# Altium PCB AT short bus ( 7 x 4.2 inches).PCBDOC
Units mil, origin at the board's own origin, x right, y up, seen from the top; angles counter-clockwise.
Board outline 7000 x 4200 mil, 10 copper layers (TopLayer, MidLayer1, MidLayer2, MidLayer3, MidLayer4, MidLayer5, MidLayer6, MidLayer7, MidLayer8, BottomLayer); 1 components, 0 nets, 103 pads, 0 vias.
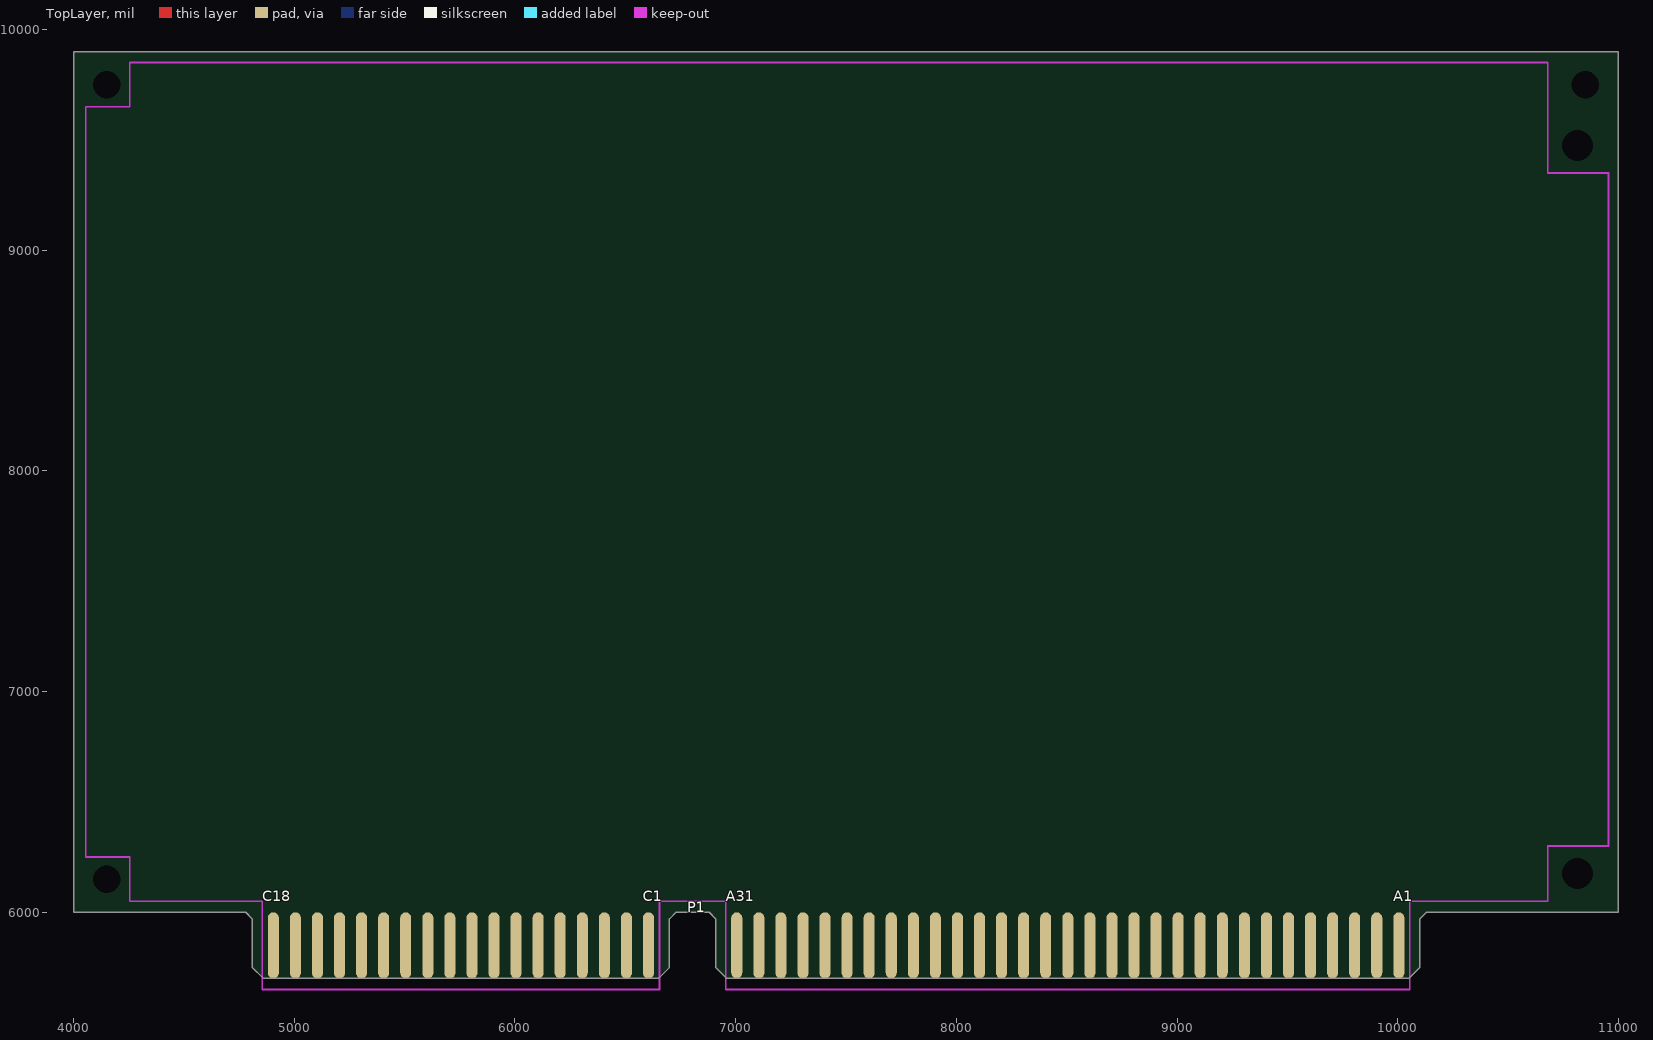
[diagram p0: TopLayer view]
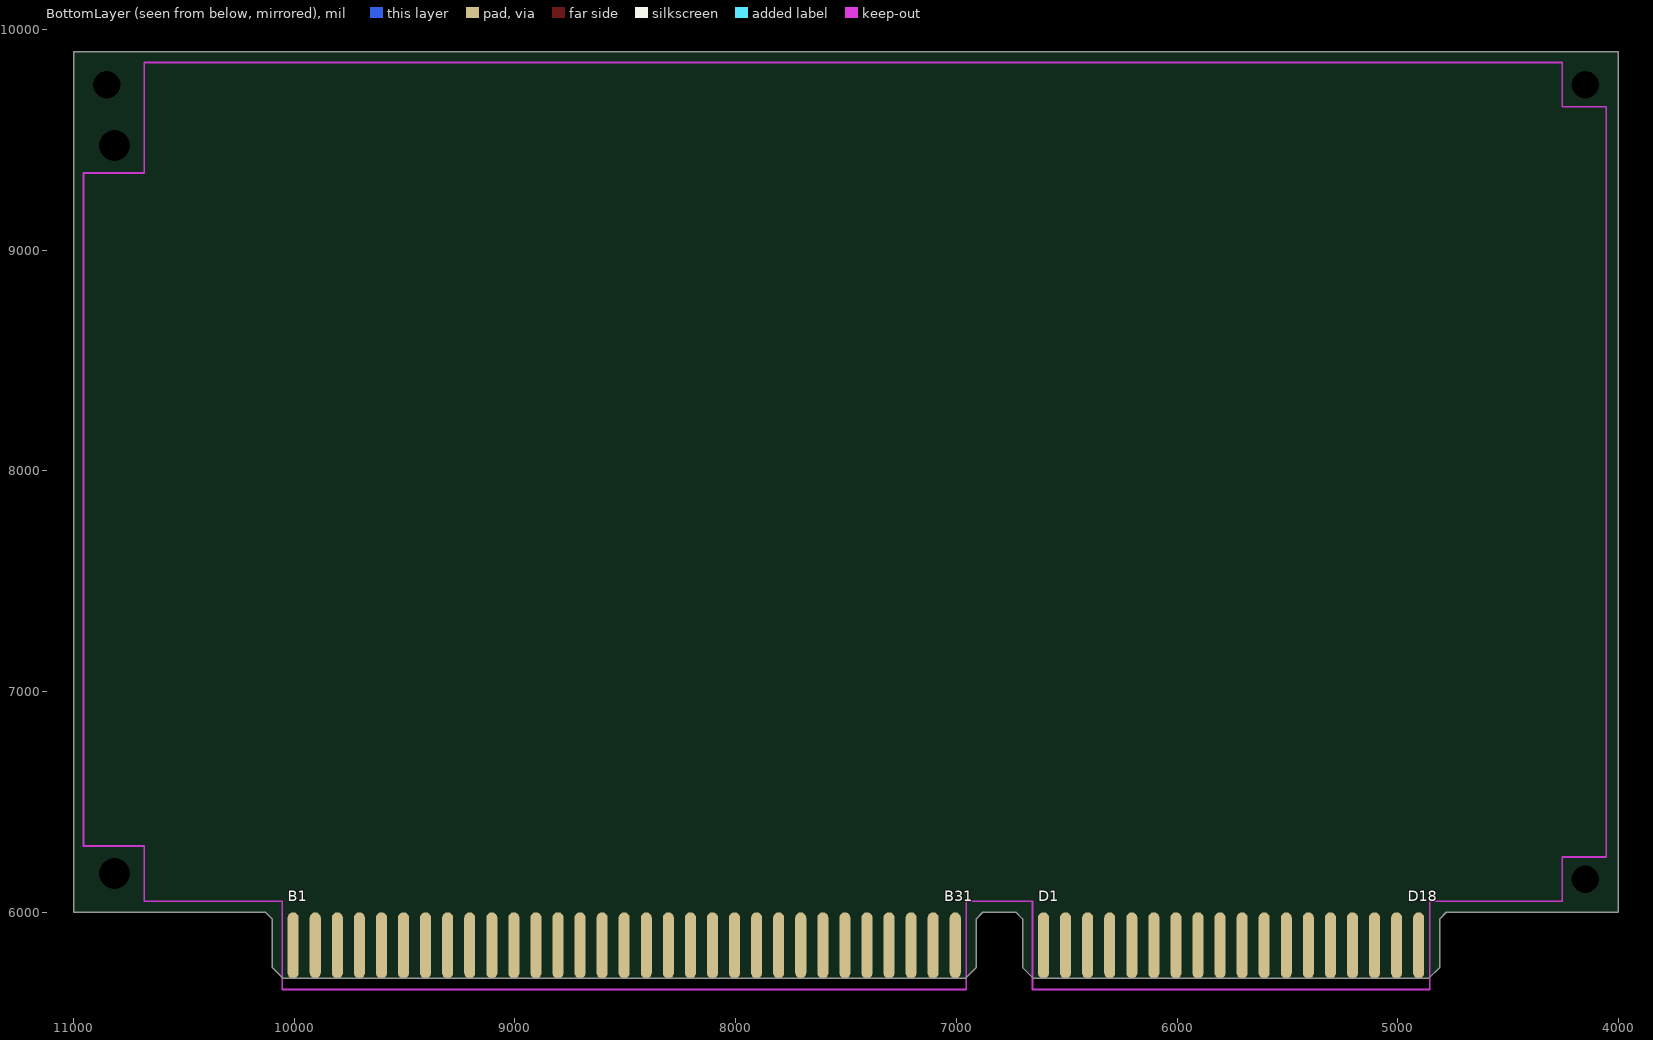
[diagram p1: BottomLayer view, seen from below]
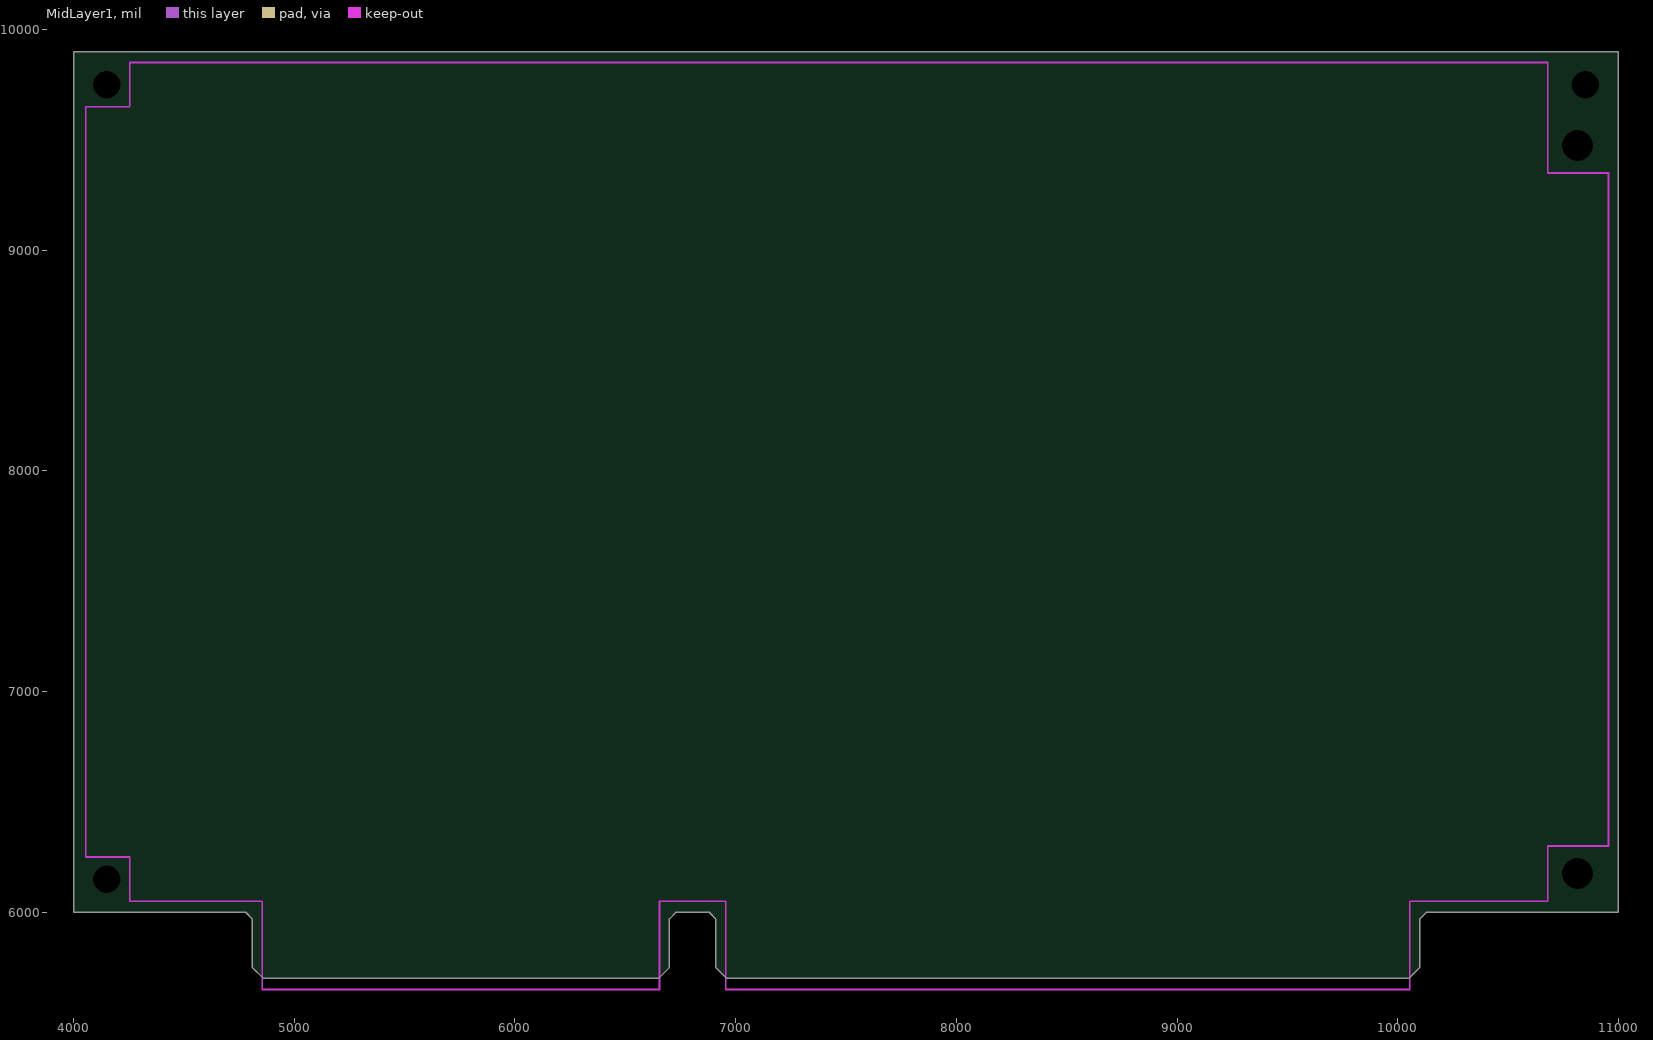
[diagram p2: MidLayer1]
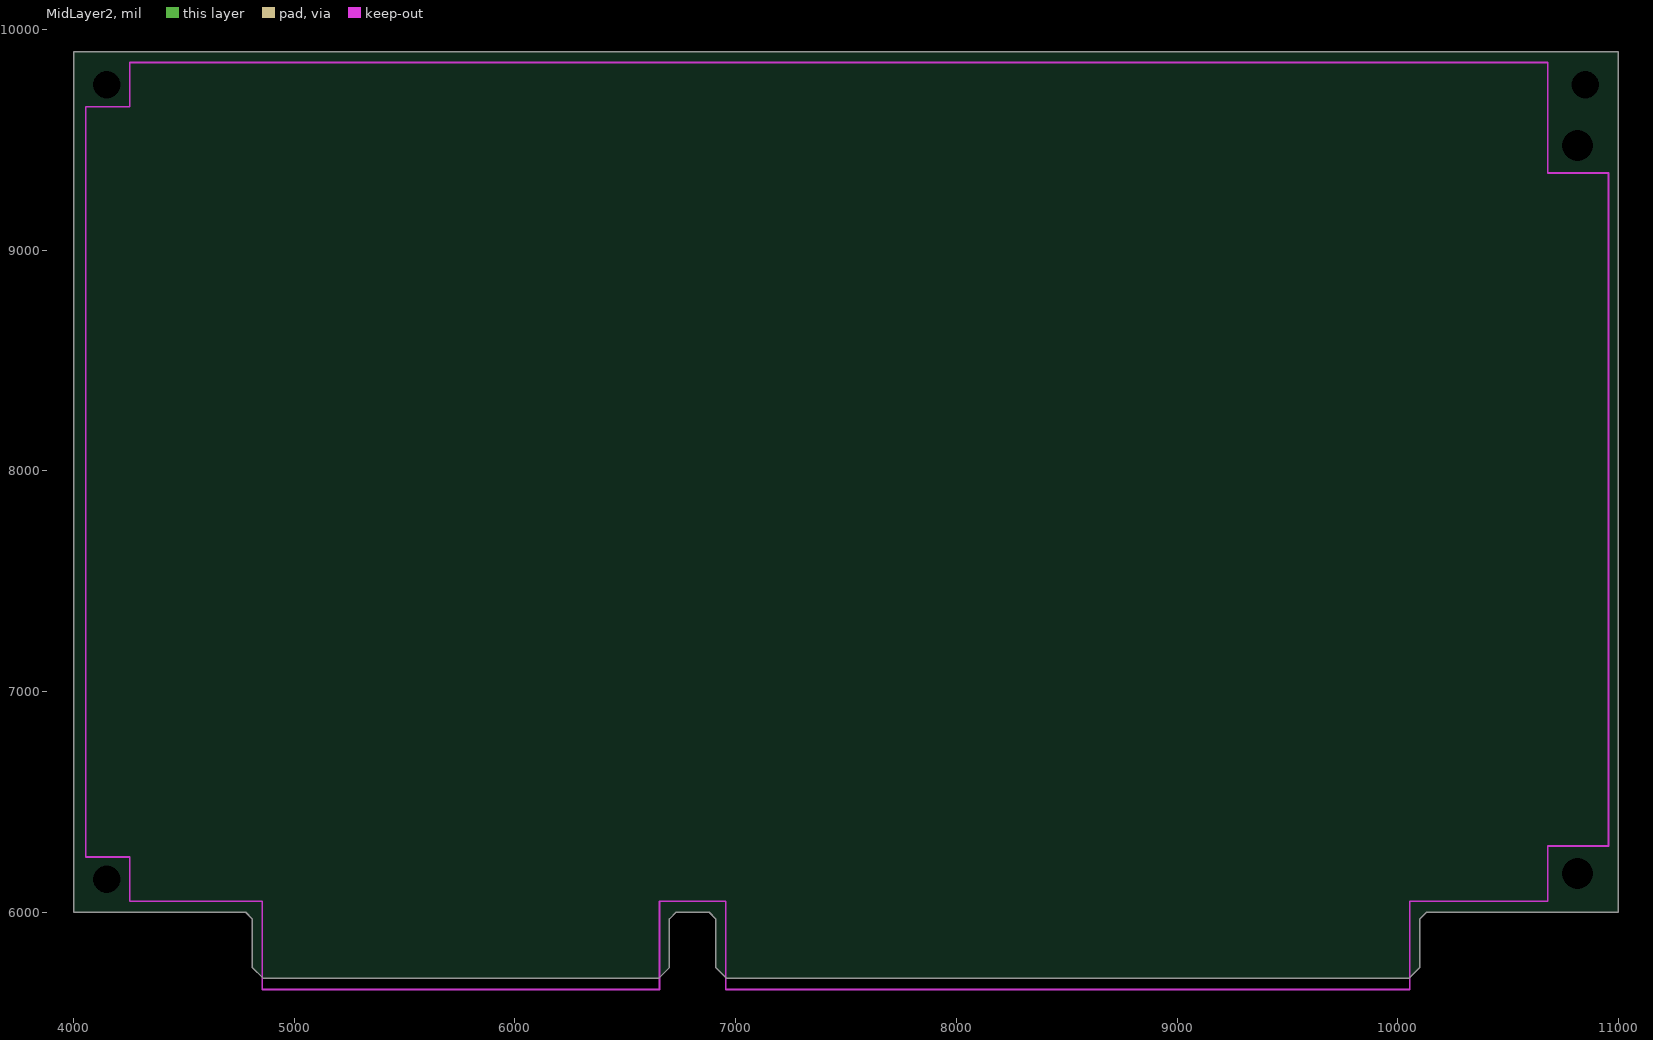
[diagram p3: MidLayer2]
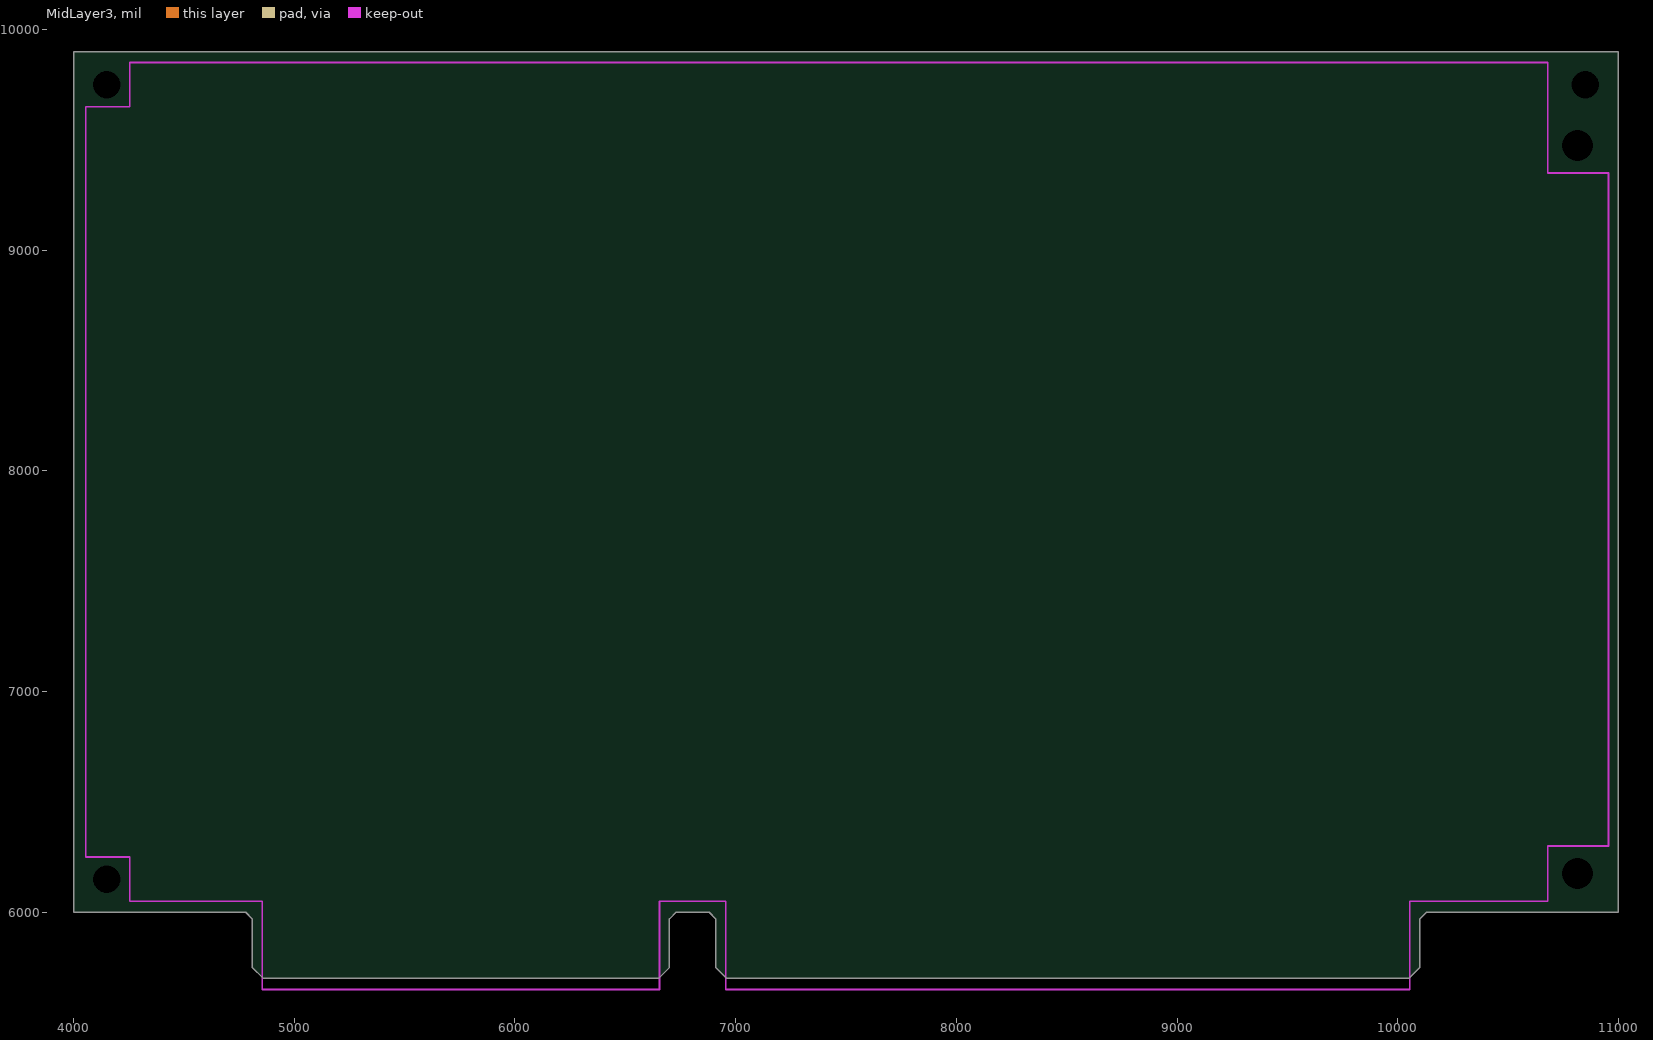
[diagram p4: MidLayer3]
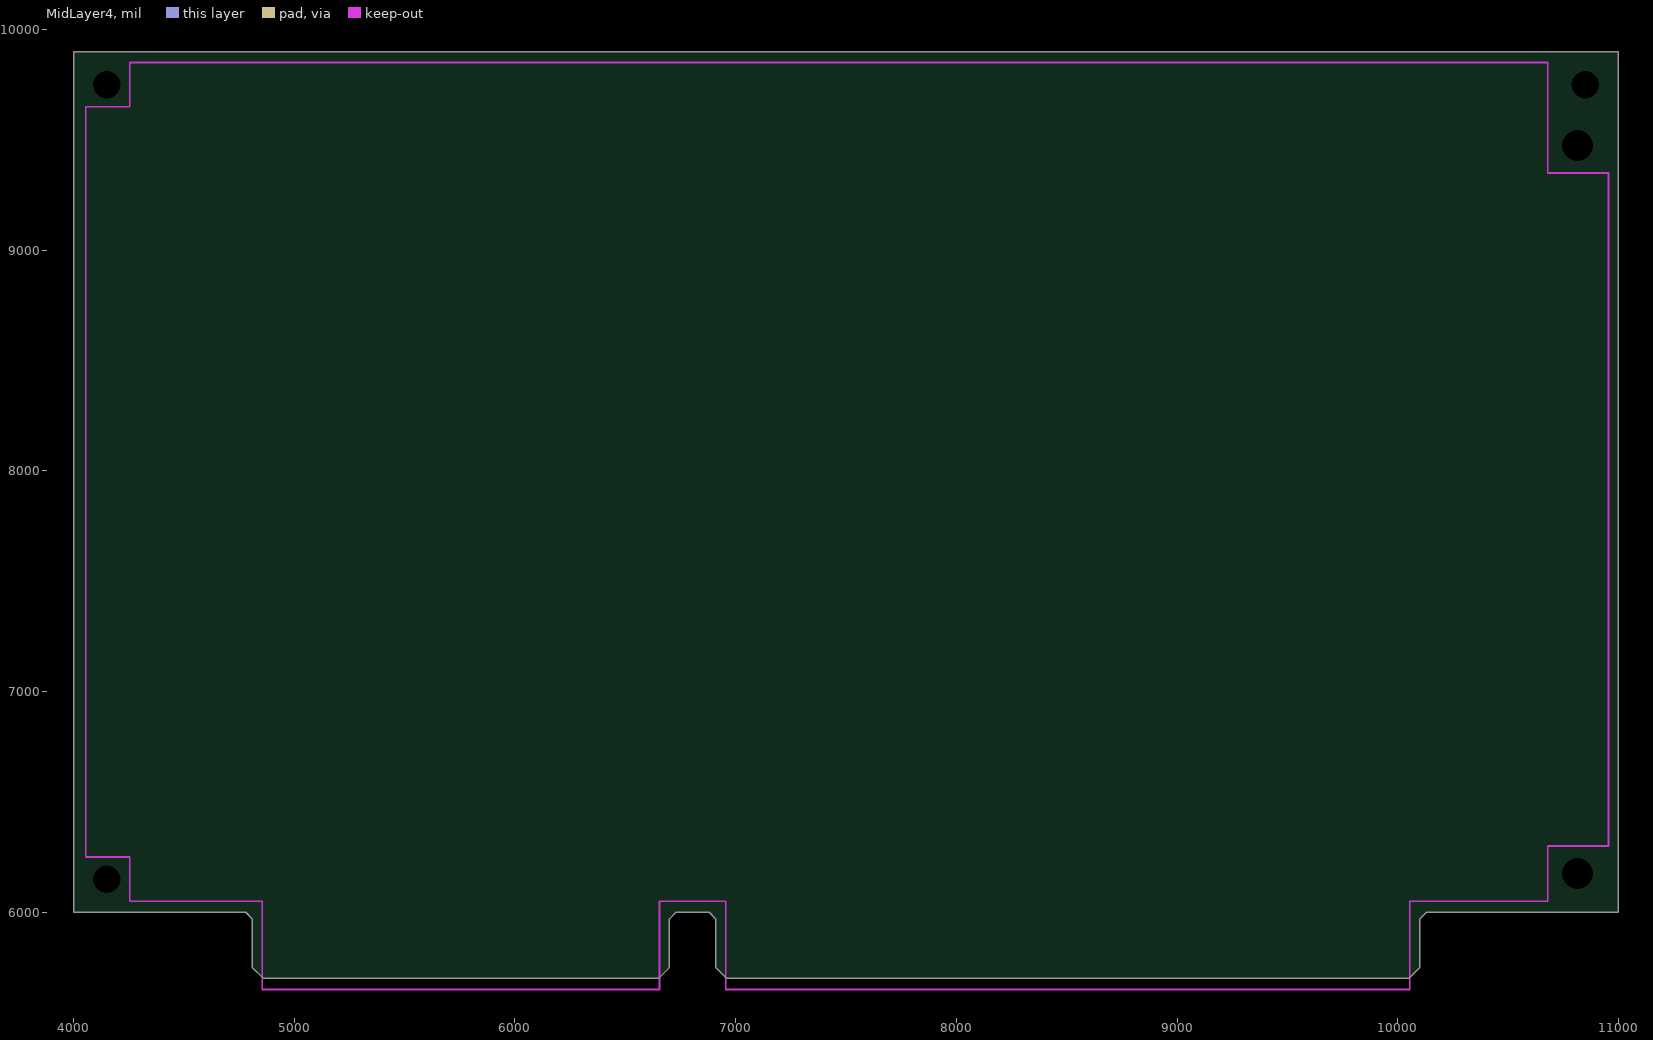
[diagram p5: MidLayer4]
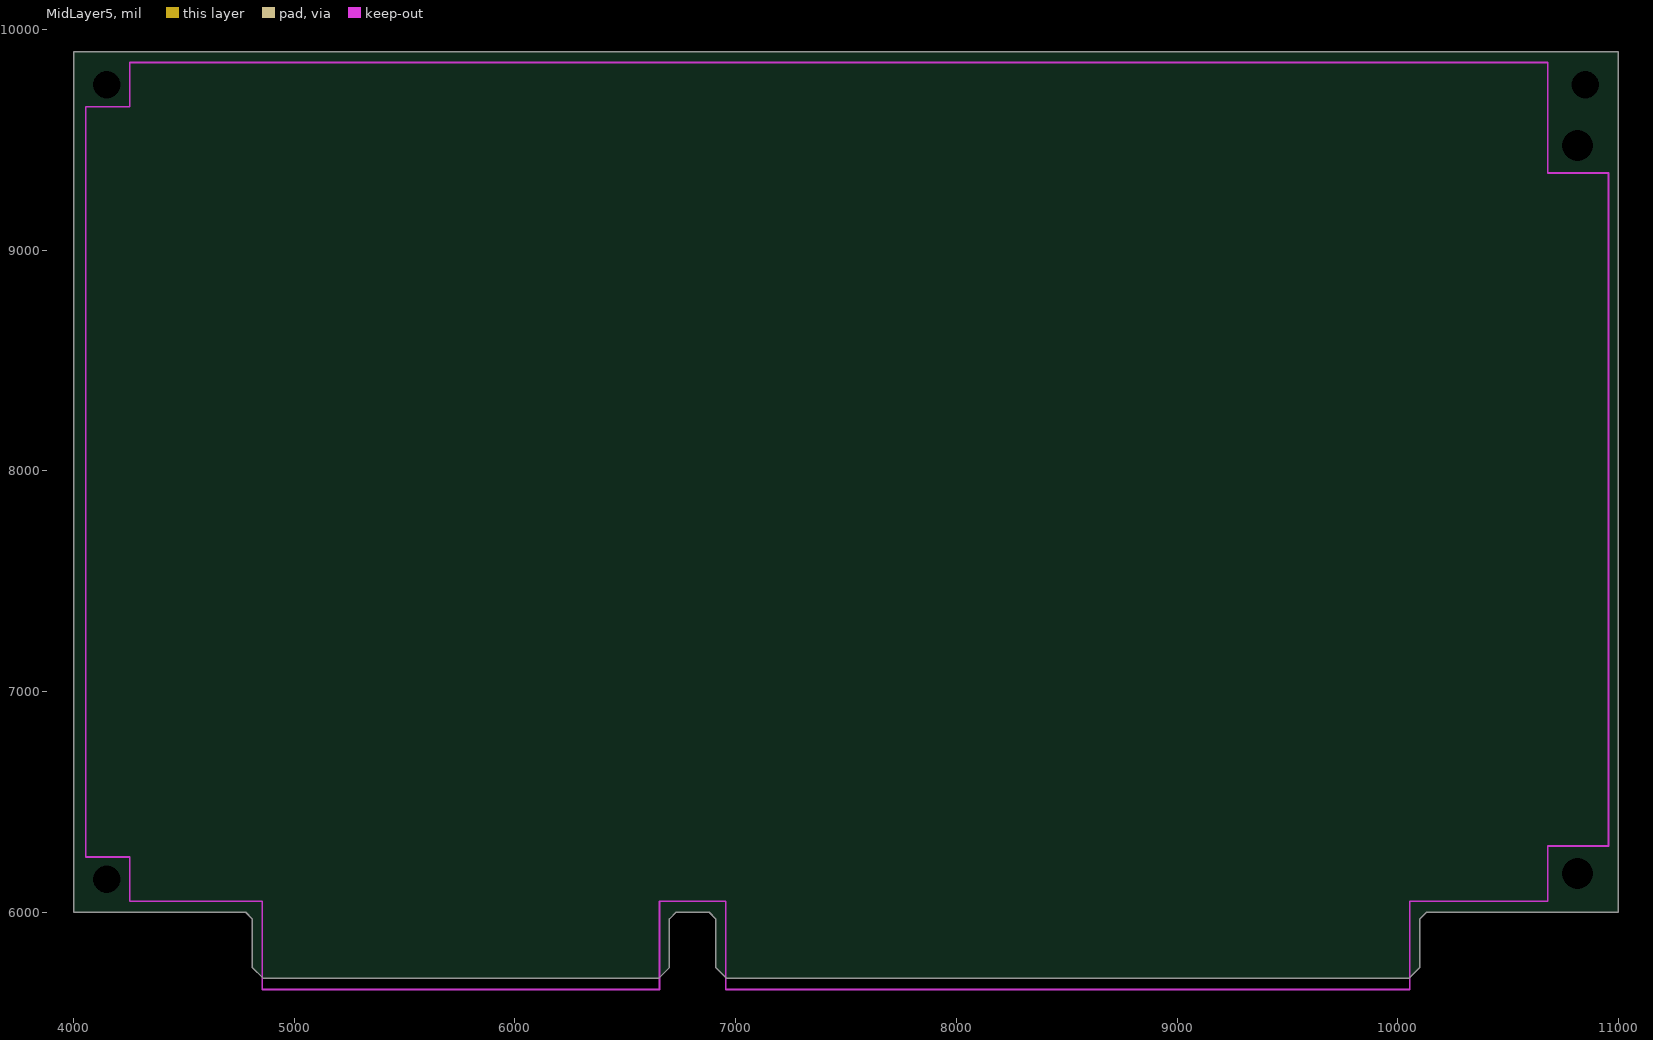
[diagram p6: MidLayer5]
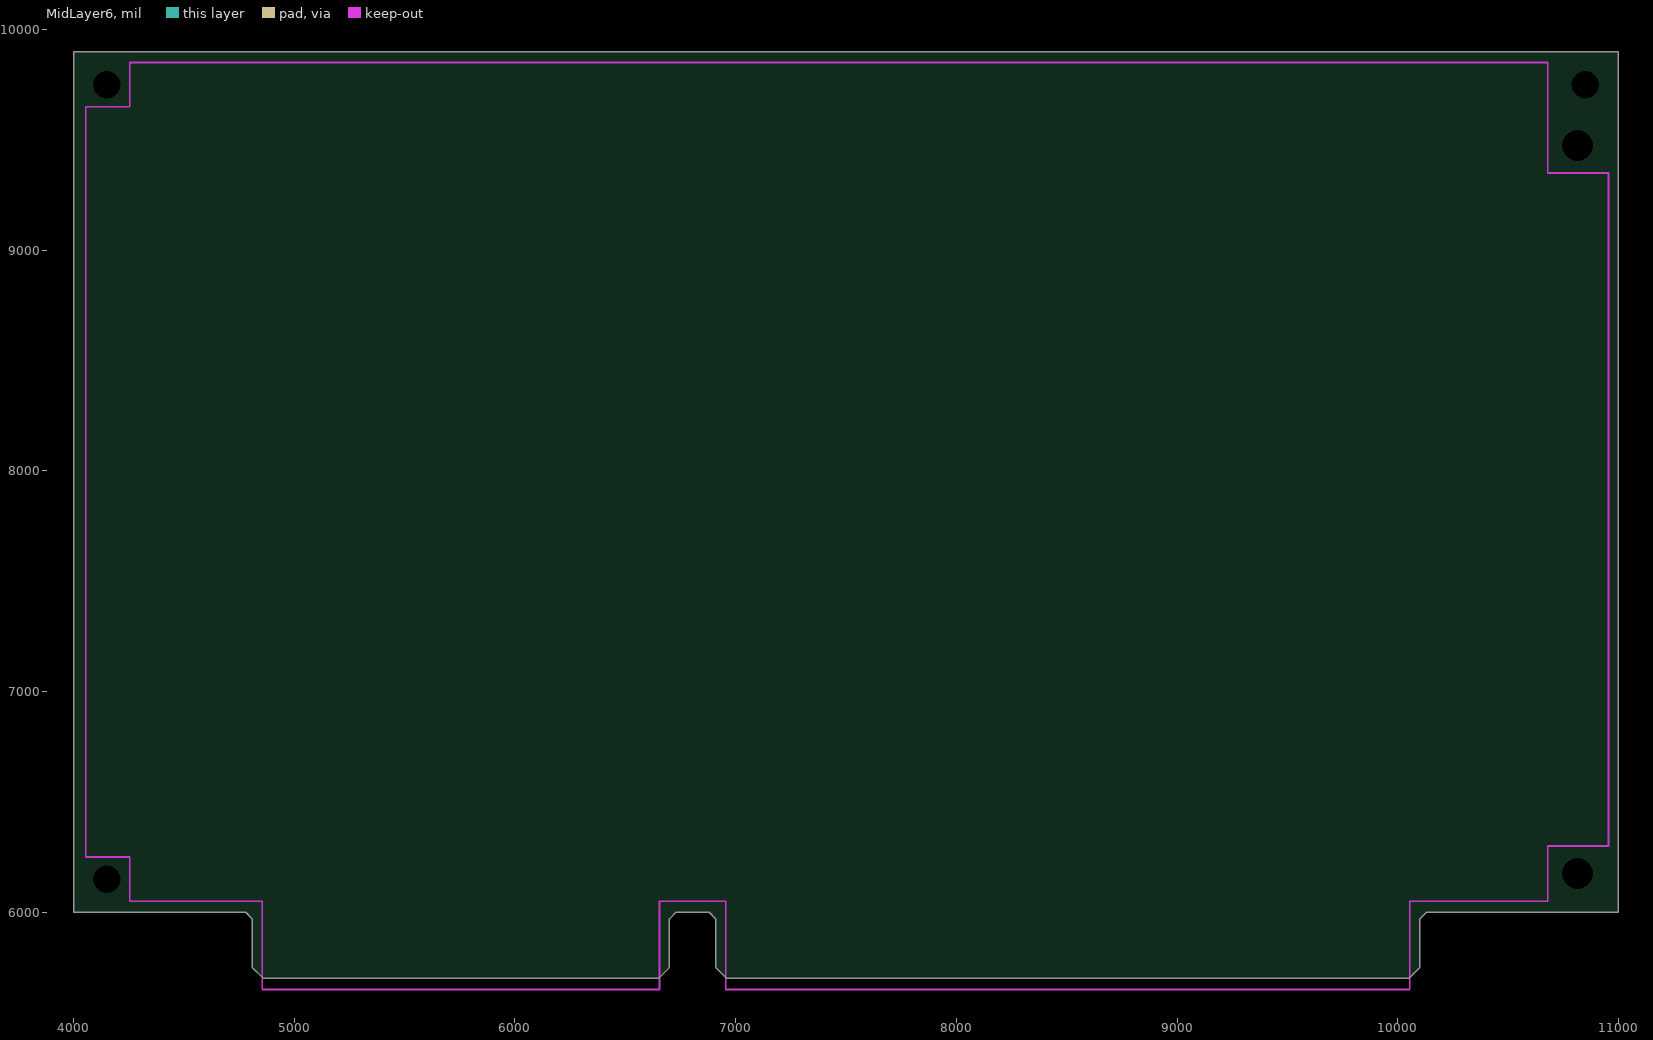
[diagram p7: MidLayer6]
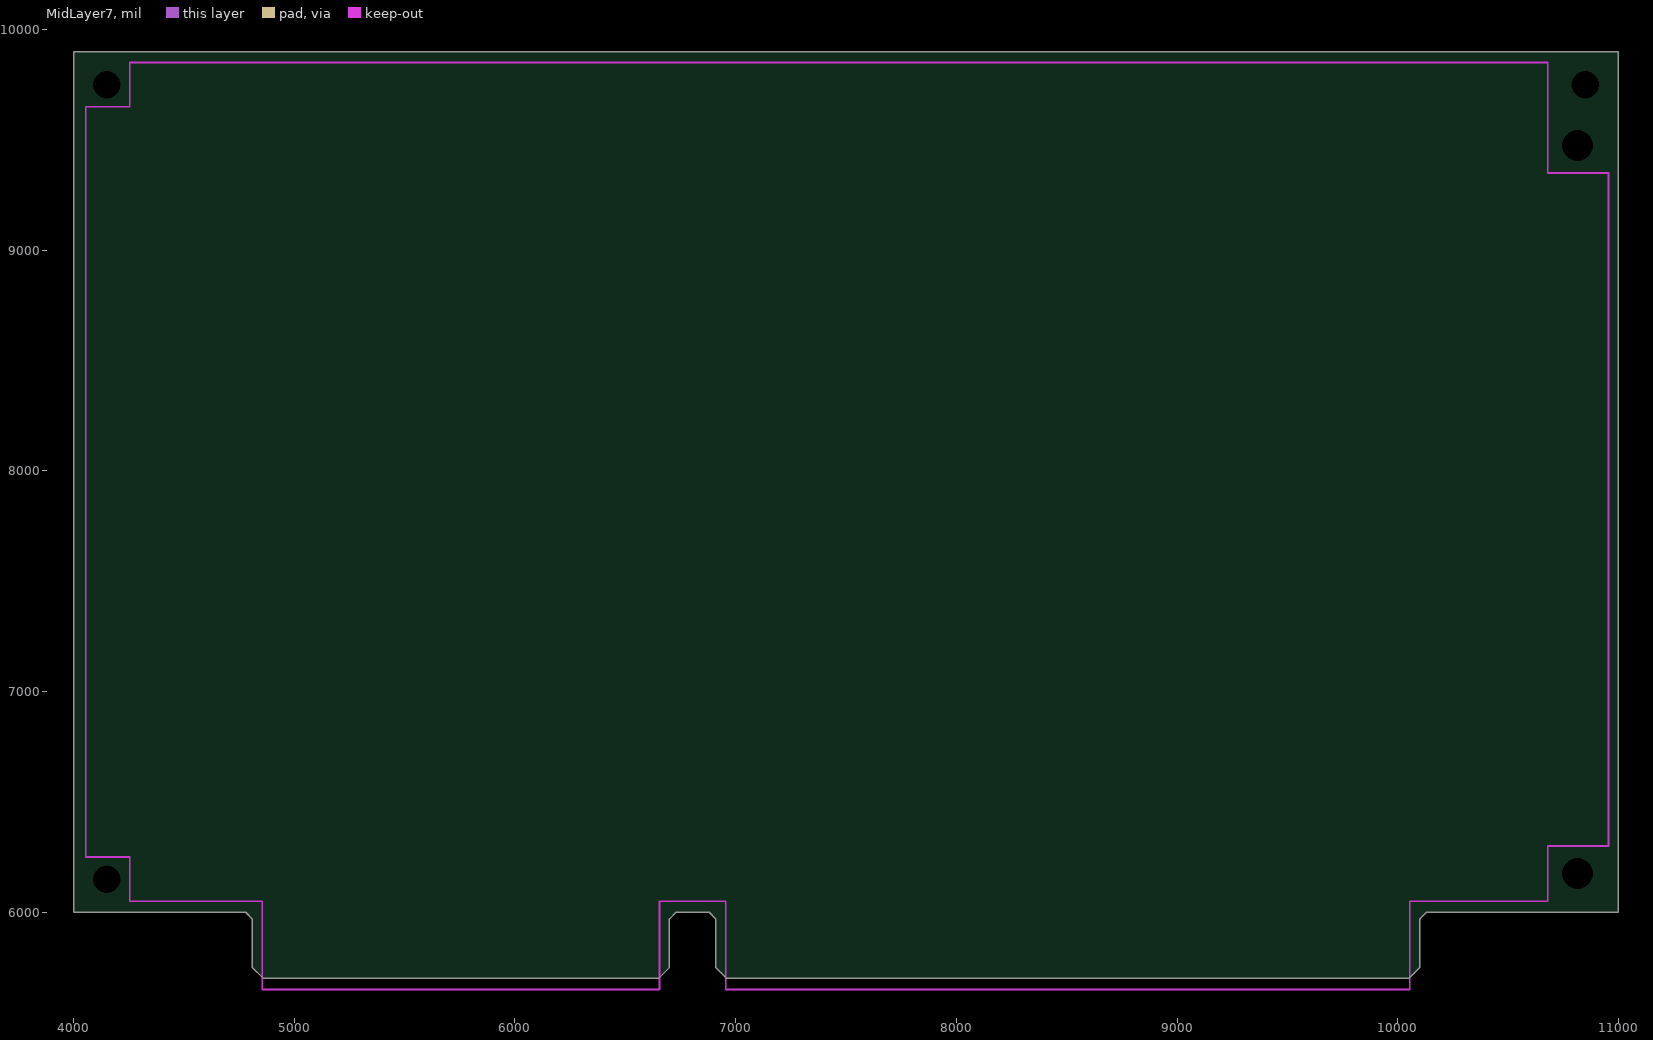
[diagram p8: MidLayer7]
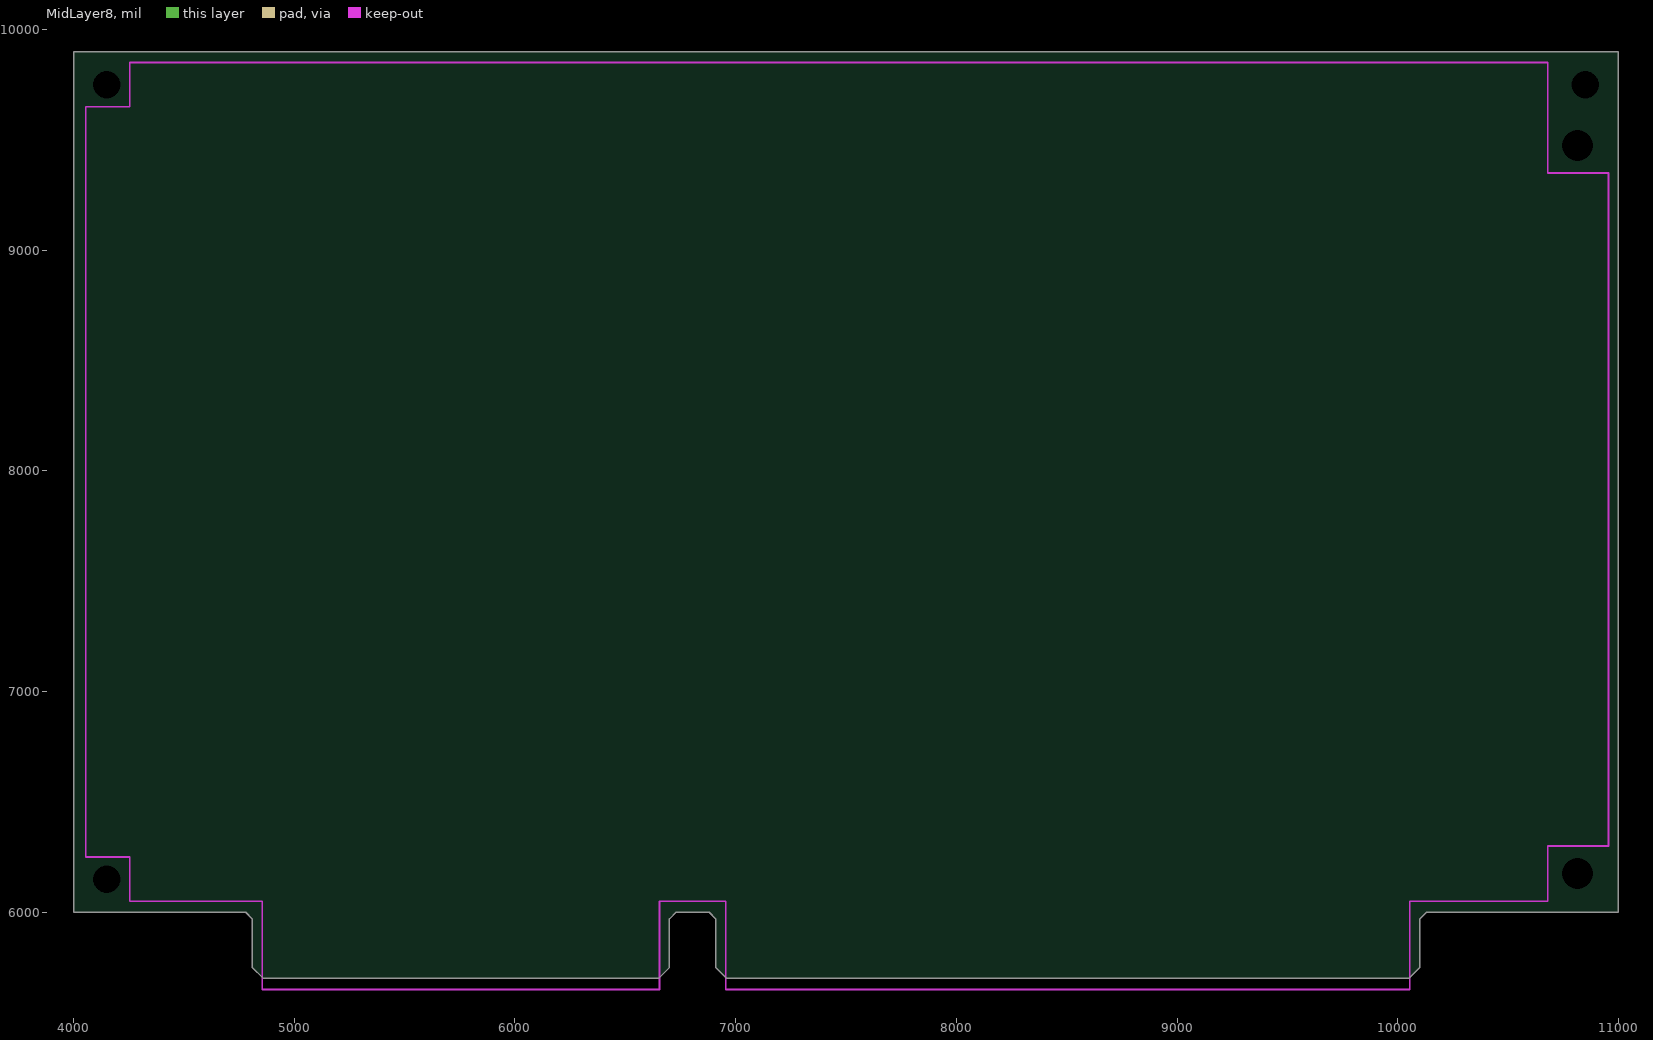
[diagram p9: MidLayer8]

## Layer stack, top to bottom
TopSolder: solder mask 0.4, Solder Resist, Dk 3.5
TopLayer: signal copper 1.4
Dielectric1: core 12.6, FR-4, Dk 4.8
MidLayer1: signal copper 1.4
Dielectric2: prepreg 12.6, FR-4, Dk 4.8
MidLayer2: signal copper 1.4
Dielectric3: core 12.6, FR-4, Dk 4.8
MidLayer3: signal copper 1.4
Dielectric4: prepreg 12.6, FR-4, Dk 4.8
MidLayer4: signal copper 1.4
Dielectric5: core 12.6, FR-4, Dk 4.8
MidLayer5: signal copper 1.4
Dielectric6: prepreg 12.6, FR-4, Dk 4.8
MidLayer6: signal copper 1.4
Dielectric7: core 12.6, FR-4, Dk 4.8
MidLayer7: signal copper 1.4
Dielectric8: prepreg 12.6, FR-4, Dk 4.8
MidLayer8: signal copper 1.4
Dielectric9: core 12.6, FR-4, Dk 4.8
BottomLayer: signal copper 1.4
BottomSolder: solder mask 0.4, Solder Resist, Dk 3.5

## Board outline
4000,6000 4780,6000 4810,5970 4810,5750 4860,5700 6650,5700 6700,5750 6700,5970 6730,6000 6880,6000 6910,5970 6910,5750 6960,5700 10050,5700 10100,5750 10100,5970 10130,6000 11000,6000 11000,9900 4000,9900

## Design rules (kind name [scope] priority, off if disabled: settings)
Clearance [All] p1: gap=10
FabricationTestPointUsage TestPointUsage [All] p1: valid=0 allowmultiple=FALSE
FabricationTestpoint Testpoint [All] p1: side=3 testpointundercomponent=TRUE minsize=40 maxsize=100 preferedsize=60 minholesize=20 maxholesize=40 preferedholesize=32 testpointgrid=1 allowsidetop=TRUE allowsidebottom=TRUE usegrid=TRUE gridtolerance=0.01
PasteMaskExpansion PasteMaskExpansion_1 [InComponent('P1')] p1: expansion=-150
PasteMaskExpansion [All] p2: expansion=0
PlaneClearance [All] p1: clearance=10
PolygonConnect [All] p1: connectstyle=Relief reliefconductorwidth=10 reliefentries=4 polygonreliefangle="90 Angle" airgapwidth=10
RoutingVias [All] p1: holewidth=28 width=50 viastyle="Through Hole" minholewidth=28 minwidth=50 maxholewidth=28 maxwidth=50
SilkToSolderMaskClearance SilkscreenOverComponentPads [IsPad] p1: minsilkscreentomaskgap=10 clearancetoexposedcopper=TRUE
SolderMaskExpansion [All] p1: expansion=2
Width [All] p1: maxlimit=10 minlimit=10 preferedwidth=10
25 further rules are at their usual default settings.

## Components (designator, comment, footprint, x,y, rotation, side; value= is the part's Value field where it differs from the comment)
P1 "PCATEDGE" PCATEDGE 10005,5850 r0 top locked

## Footprints (in the part's own frame and the unit in brackets; to place one, negate y for a bottom-side part, rotate by r counter-clockwise, add the part's x,y. Pads: shape width x height; smd on the part's side, far side on the other; paste and mask are expansions set on the pad)
PCATEDGE [mil]
  oval 50x300 smd: A1(0,0) A2(-100,0) A3(-200,0) A4(-300,0) A5(-400,0) A6(-500,0) A7(-600,0) A8(-700,0) A9(-800,0) A10(-900,0) A11(-1000,0) A12(-1100,0) A13(-1200,0) A14(-1300,0) A15(-1400,0) A16(-1500,0) A17(-1600,0) A18(-1700,0) A19(-1800,0) A20(-1900,0) A21(-2000,0) A22(-2100,0) A23(-2200,0) A24(-2300,0) A25(-2400,0) A26(-2500,0) A27(-2600,0) A28(-2700,0) A29(-2800,0) A30(-2900,0) A31(-3000,0) C1(-3400,0) C2(-3500,0) C3(-3600,0) C4(-3700,0) C5(-3800,0) C6(-3900,0) C7(-4000,0) C8(-4100,0) C9(-4200,0) C10(-4300,0) C11(-4400,0) C12(-4500,0) C13(-4600,0) C14(-4700,0) C15(-4800,0) C16(-4900,0) C17(-5000,0) C18(-5100,0)
  oval 50x300 smd far side: B1(0,0) B2(-100,0) B3(-200,0) B4(-300,0) B5(-400,0) B6(-500,0) B7(-600,0) B8(-700,0) B9(-800,0) B10(-900,0) B11(-1000,0) B12(-1100,0) B13(-1200,0) B14(-1300,0) B15(-1400,0) B16(-1500,0) B17(-1600,0) B18(-1700,0) B19(-1800,0) B20(-1900,0) B21(-2000,0) B22(-2100,0) B23(-2200,0) B24(-2300,0) B25(-2400,0) B26(-2500,0) B27(-2600,0) B28(-2700,0) B29(-2800,0) B30(-2900,0) B31(-3000,0) D1(-3400,0) D2(-3500,0) D3(-3600,0) D4(-3700,0) D5(-3800,0) D6(-3900,0) D7(-4000,0) D8(-4100,0) D9(-4200,0) D10(-4300,0) D11(-4400,0) D12(-4500,0) D13(-4600,0) D14(-4700,0) D15(-4800,0) D16(-4900,0) D17(-5000,0) D18(-5100,0)

## Free pads (board coordinates)
  round 50 hole 140: 1(10815,6175) 2(10815,9475)
  round 50 hole 125: 3(10850,9750) 4(4150,9750) 5(4150,6150)

## Nets (pads, with @x,y where several pads share a name; then routed paths per layer and width w, separated by ;. In a path a pad name is that pad's centre, name@x,y a point inside that pad or via, vN(x,y) a via of type N, cw(c..) or ccw(c..) an arc to the next point about the centre after c; other vN are vias at no path point)
pads on no net: P1.A1 P1.A2 P1.A3 P1.A4 P1.A5 P1.A6 P1.A7 P1.A8 P1.A9 P1.A10 P1.A11 P1.A12 P1.A13 P1.A14 P1.A15 P1.A16 P1.A17 P1.A18 P1.A19 P1.A20 P1.A21 P1.A22 P1.A23 P1.A24 P1.A25 P1.A26 P1.A27 P1.A28 P1.A29 P1.A30 P1.A31 P1.B1 P1.B2 P1.B3 P1.B4 P1.B5 P1.B6 P1.B7 P1.B8 P1.B9 P1.B10 P1.B11 P1.B12 P1.B13 P1.B14 P1.B15 P1.B16 P1.B17 P1.B18 P1.B19 P1.B20 P1.B21 P1.B22 P1.B23 P1.B24 P1.B25 P1.B26 P1.B27 P1.B28 P1.B29 P1.B30 P1.B31 P1.C1 P1.C2 P1.C3 P1.C4 P1.C5 P1.C6 P1.C7 P1.C8 P1.C9 P1.C10 P1.C11 P1.C12 P1.C13 P1.C14 P1.C15 P1.C16 P1.C17 P1.C18 P1.D1 P1.D2 P1.D3 P1.D4 P1.D5 P1.D6 P1.D7 P1.D8 P1.D9 P1.D10 P1.D11 P1.D12 P1.D13 P1.D14 P1.D15 P1.D16 P1.D17 P1.D18

## Keep-outs
KeepOutLayer:
  lines w8: 4055,6250 4055,9650 4255,9650 4255,9850 10680,9850 10680,9350 10955,9350 10955,6300 10680,6300 10680,6050 10055,6050 10055,5650 6955,5650 6955,6050 6655,6050 6655,5650 4855,5650 4855,6050 4255,6050 4255,6250 4055,6250

## Other copper
TopLayer:
  text ".GTL" at 10700,10050 h90
MidLayer1:
  text ".G1" at 10700,10050 h90
MidLayer2:
  text ".G2" at 10700,10050 h90
MidLayer3:
  text ".G3" at 10700,10050 h90
MidLayer4:
  text ".G4" at 10700,10050 h90
MidLayer5:
  text ".G5" at 10700,10050 h90
MidLayer6:
  text ".G6" at 10700,10050 h90
MidLayer7:
  text ".G7" at 10700,10050 h90
MidLayer8:
  text ".G8" at 10700,10050 h90
BottomLayer:
  text "P/N XXXXXX-XXX REV A" at 5320,10100 h75
  text ".GBL" at 10700,10050 h90

## Silkscreen, mask and mechanical layers (free items; w line width, h text height)
TopOverlay:
  rectangle: 4281,10593 5031,10793
  rectangle: 4281,10303 5031,10503
  lines w10: 5392.59,10695.97 ccw(c5441,10735.5) 5392.71,10695.83
  text "C" at 5496,10698 h60
  text "2002 COMPANY NAME" at 5646,10698 h75
  text "S/N" at 4031,10650.5 h75
  text "BOARD NAME" at 5496,10523 h75
  text "ASSY NO.: XXXXXX" at 5496,10373 h75
  text "REV" at 4031,10353 h75
  text ".GTO" at 10700,10050 h90
TopPaste:
  text ".GTP" at 10700,10050 h90
BottomPaste:
  text ".GBP" at 10700,10050 h90
TopSolder:
  rectangle: 4785,5675 6725,6005
  rectangle: 6885,5675 10125,6005
  text ".GTS" at 10700,10050 h90
BottomSolder:
  rectangle: 4785,5675 6725,6005
  rectangle: 6885,5675 10125,6005
  text ".GBS" at 10700,10050 h90
Mechanical1:
  the board outline again, w20
Mechanical3:
  lines w10: 10690,6125 10690,6075 10740,6075 ; 10690,6150 10690,6200 ; 10690,6225 10690,6275 10740,6275 ; 10690,9425 10690,9375 10740,9375 ; 10690,9450 10690,9500 ; 10690,9525 10690,9575 10740,9575 ; 10765,6075 10815,6075 ; 10765,6275 10815,6275 ; 10765,9375 10815,9375 ; 10765,9575 10815,9575 ; 10840,6075 10890,6075 ; 10840,6275 10890,6275 ; 10840,9375 10890,9375 ; 10840,9575 10890,9575 ; 10915,6075 10965,6075 ; 10915,6275 10965,6275 ; 10915,9375 10965,9375 ; 10915,9575 10965,9575 ; 11000,6075 11040,6075 11040,4925 11065,4925 11065,9650 11490,9650 11490,9675 11040,9675 11040,9575 11000,9575 ; 11000,6275 11040,6275 11040,9375 11000,9375
Mechanical4:
  circle w10: c4845.67,5719.32 r100
  lines w10: 12120,7695 12195,7620 12270,7695 12345,7620 12420,7695 12495,7620 12570,7695 ; 12601.25,6613.75 12845,6370 13045,6370 ; 13745,7820 14470,7820 ; 15095,6370 14845,6370 15138.75,6663.75 ; 16045,6570 16045,6970 16245,7070 15845,7170 16045,7270 16045,7670 ; 4703.67,5666.32 4703.67,5721.32 4723.67,5671.32 4703.67,5666.32 ; 4703.87,5721.16 4705,5775 4725.36,5771.79 4703.87,5721.16 ; 12495,6720 12620,6632.5 12582.5,6595 12495,6720 ; 15120,6682.5 15245,6770 15157.5,6645 15120,6682.5
  lines w20: 12145,7670 12145,6770 12245,6670 12445,6670 12545,6770 12545,7670 ; 15145,7670 15145,6870 15345,6670 16045,6670
  text ".Pcb_File_Name_No_Path" at 8800,10240 h90
  text ".Printout_Name" at 8800,10050 h90
  text "DETAIL A" at 13745,7870 h120
  text "o" at 13770,6395 h60
  text "o" at 15820,6395 h60
  text ".020 X 45  CHAMFER" at 13120,6320 h90
  text "0.05 X 45  CHAMFER" at 15170,6320 h90
  text "BOTH SIDES" at 13120,6145 h90
  text "TYP 4 PLCS" at 15170,6145 h90
  text "ENTIRE LENGTH OF" at 13120,5970 h90
  text "EDGE CONNECTOR" at 13120,5795 h90
  text "SEE DETAIL A" at 4210,5690 h50
DrillDrawing:
  text ".LEGEND" at 12050,8550 h90
  text "Drilling Details." at 12050,8400 h90

## Dimensions
4150,5980 to 4000,6000 on Mechanical4
3980,6150 to 4000,6000 on Mechanical4
10150,5700 to 10130,6000 on Mechanical4

## Text inside footprints (layer, text, board x,y; h text height)
P1: TopOverlay "A31" at 6955,6050 h48; TopOverlay "C18" at 4855,6050 h48; TopOverlay "C1" at 6580,6050 h48; TopOverlay "A1" at 9980,6050 h48; BottomOverlay "B1" at 10030,6050 h48; BottomOverlay "B31" at 7055,6050 h48; BottomOverlay "D1" at 6630,6050 h48; BottomOverlay "D18" at 4955,6050 h48